# Altium PCB EEU_SSSHIpin.PcbDoc (part 2 of 2)
Units mil, origin at the board's own origin, x right, y up, seen from the top; angles counter-clockwise.
Board outline 6000 x 4000 mil, 2 copper layers (Top Layer, Bottom Layer); 240 components, 16 nets, 1184 pads, 256 vias.
Unrouted connection lines stored in the file: 240.
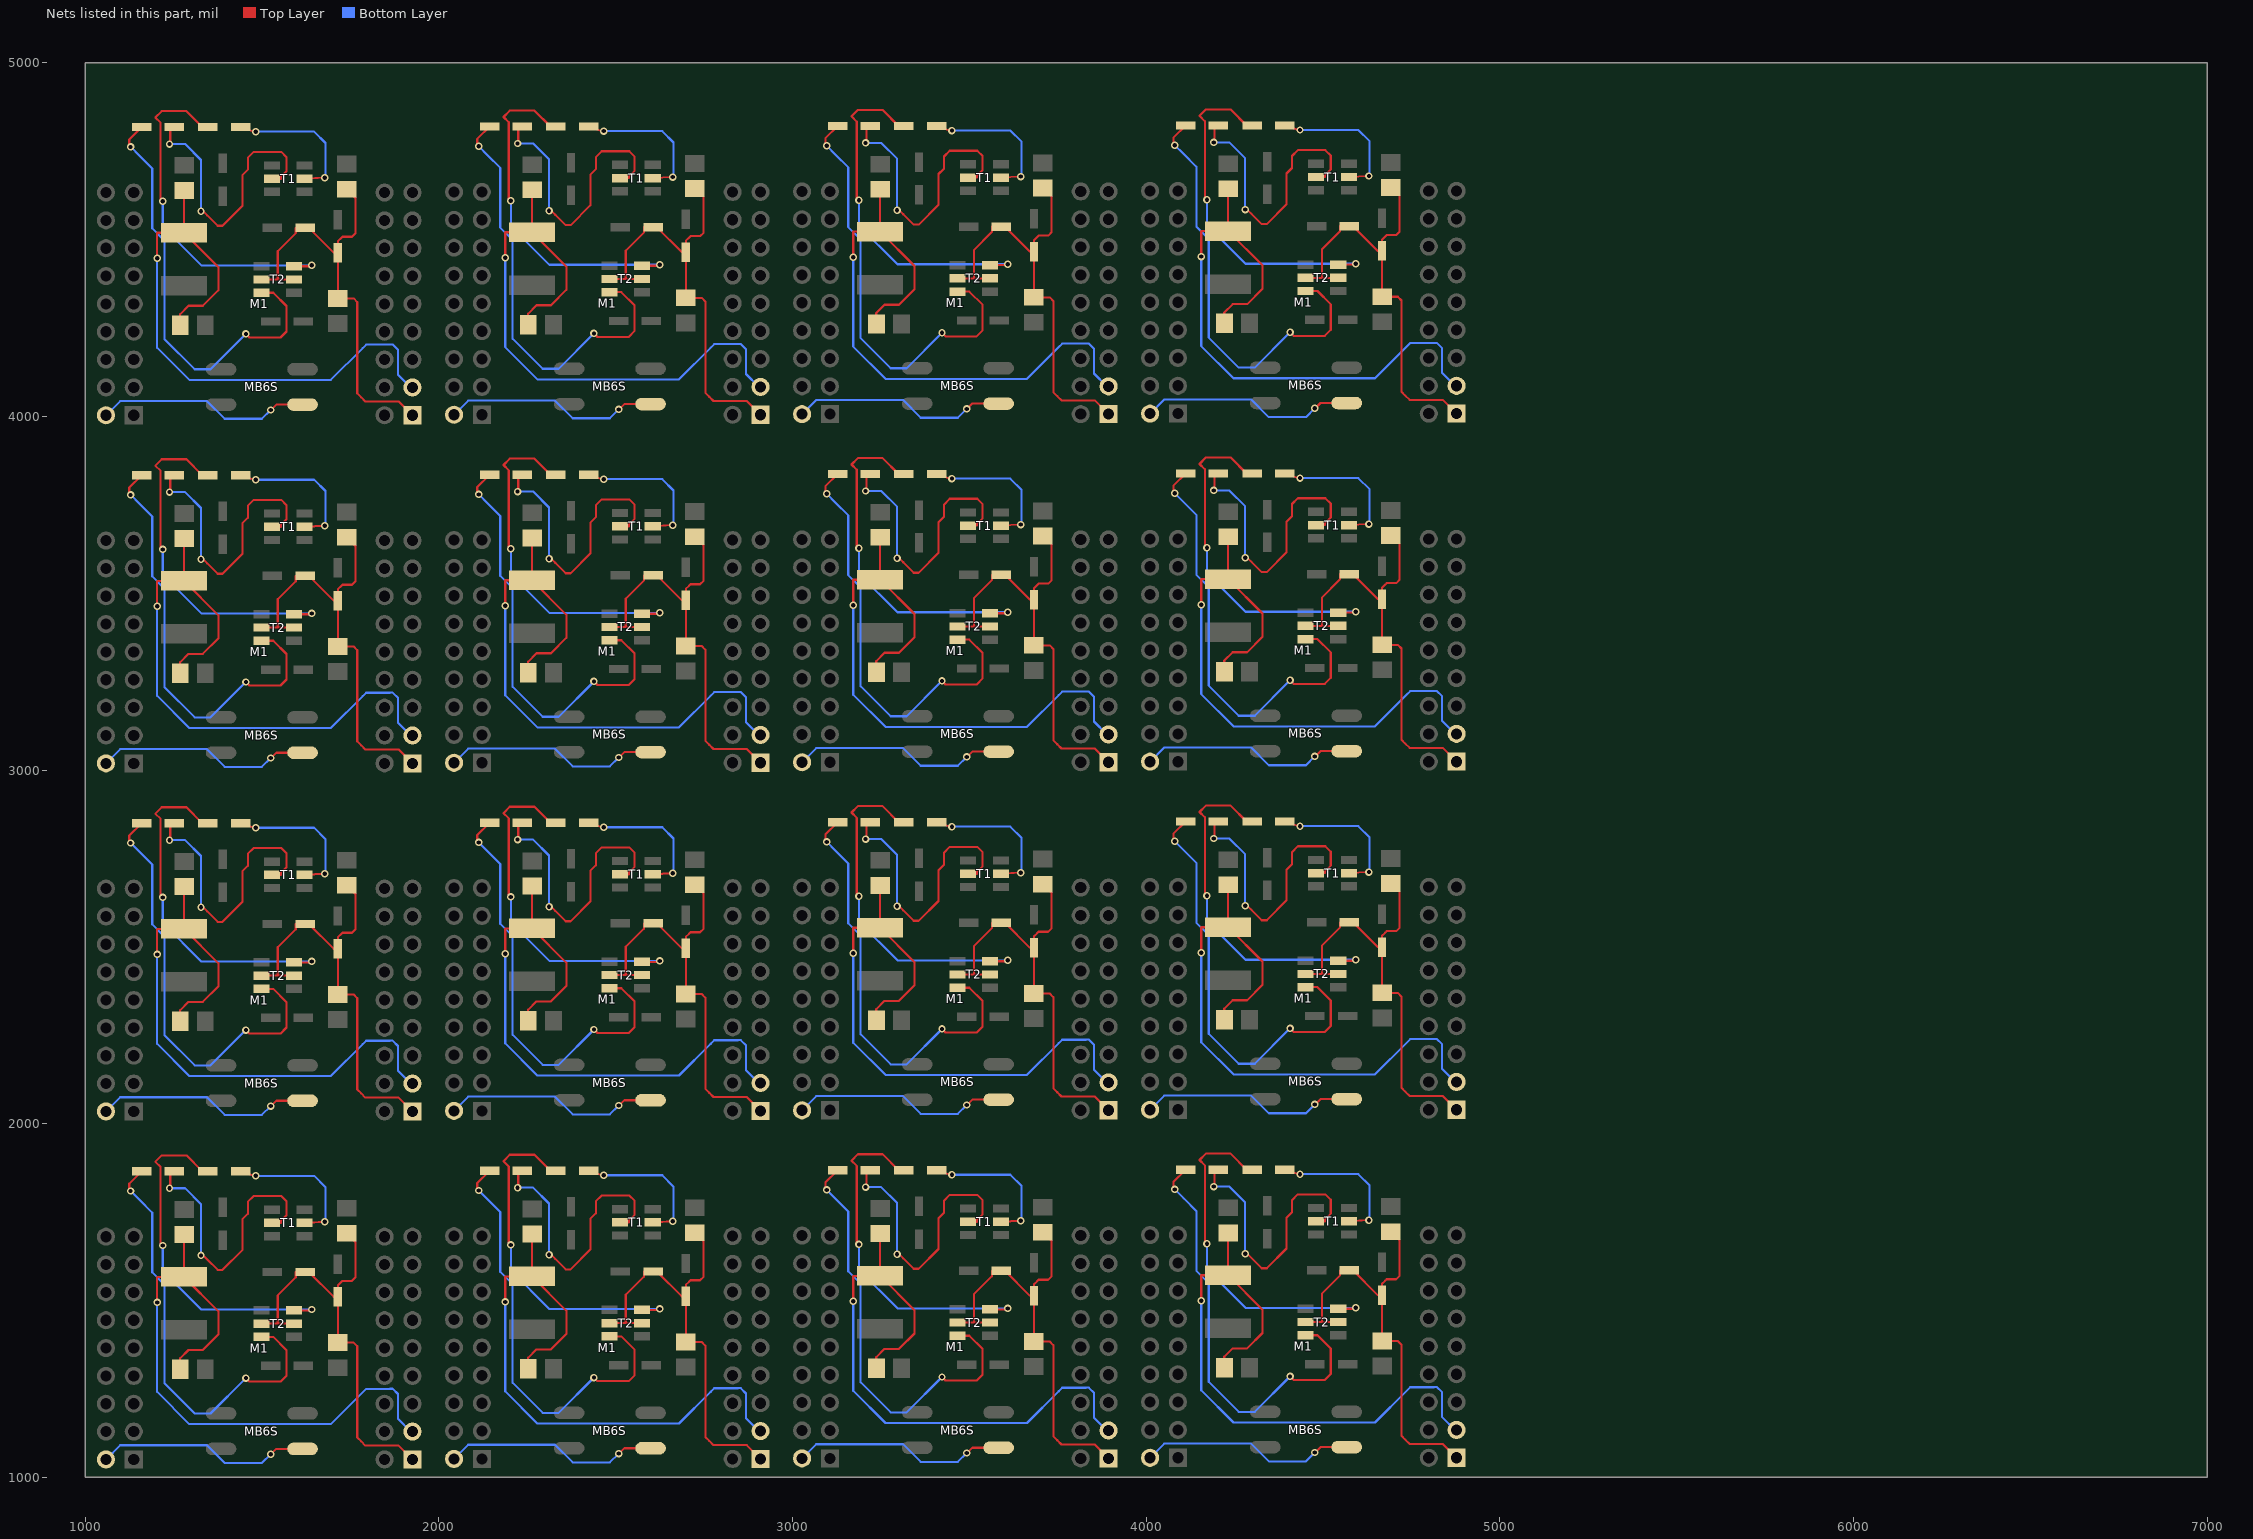
[diagram p2: the nets of this part, all layers, seen from the top]

## Via types
v1: diameter 21, hole 12, Top Layer to Bottom Layer, 256 vias

## Nets (pads, with @x,y where several pads share a name; then routed paths per layer and width w, separated by ;. In a path a pad name is that pad's centre, name@x,y a point inside that pad or via, vN(x,y) a via of type N, cw(c..) or ccw(c..) an arc to the next point about the centre after c; other vN are vias at no path point) (continued)
NetD5_1: D5.1 T2.4 | length 19934.5
  Top Layer w6: v1@1124,1809.8 1124,1830.8 D5.1@1159,1865.8 ; v1@1124,2794.05 1124,2815.05 D5.1@1159,2850.05 ; v1@1124,3778.3 1124,3799.3 D5.1@1159,3834.3 ; v1@1124,4762.55 1124,4783.55 D5.1@1159,4818.55 ; v1(1454,1280.8) 1464,1270.8 1552,1270.8 1569,1287.8 1569,1359.8 1531.41,1397.4 T2.4@1497.74,1397.4 ; v1(1454,2265.05) 1464,2255.05 1552,2255.05 1569,2272.05 1569,2344.05 1531.41,2381.65 T2.4@1497.74,2381.65 ; v1(1454,3249.3) 1464,3239.3 1552,3239.3 1569,3256.3 1569,3328.3 1531.41,3365.9 T2.4@1497.74,3365.9 ; v1(1454,4233.55) 1464,4223.55 1552,4223.55 1569,4240.55 1569,4312.55 1531.41,4350.15 T2.4@1497.74,4350.15 ; v1@2108.26,1811.35 2108.26,1832.35 D5.1@2143.26,1867.35 ; v1@2108.26,2795.6 2108.26,2816.6 D5.1@2143.26,2851.6 ; v1@2108.26,3779.85 2108.26,3800.85 D5.1@2143.26,3835.85 ; v1@2108.26,4764.1 2108.26,4785.1 D5.1@2143.26,4820.1 ; v1(2438.26,1282.35) 2448.26,1272.35 2536.26,1272.35 2553.26,1289.35 2553.26,1361.35 2515.66,1398.94 T2.4@2482,1398.94 ; v1(2438.26,2266.6) 2448.26,2256.6 2536.26,2256.6 2553.26,2273.6 2553.26,2345.6 2515.66,2383.2 T2.4@2482,2383.2 ; v1(2438.26,3250.85) 2448.26,3240.85 2536.26,3240.85 2553.26,3257.85 2553.26,3329.85 2515.66,3367.45 T2.4@2482,3367.45 ; v1(2438.26,4235.1) 2448.26,4225.1 2536.26,4225.1 2553.26,4242.1 2553.26,4314.1 2515.66,4351.7 T2.4@2482,4351.7 ; v1@3092.51,1812.89 3092.51,1833.89 D5.1@3127.51,1868.89 ; v1@3092.51,2797.15 3092.51,2818.15 D5.1@3127.51,2853.15 ; v1@3092.51,3781.4 3092.51,3802.4 D5.1@3127.51,3837.4 ; v1@3092.51,4765.65 3092.51,4786.65 D5.1@3127.51,4821.65 ; v1(3422.51,1283.89) 3432.51,1273.89 3520.51,1273.89 3537.51,1290.89 3537.51,1362.89 3499.91,1400.49 T2.4@3466.25,1400.49 ; v1(3422.51,2268.15) 3432.51,2258.15 3520.51,2258.15 3537.51,2275.15 3537.51,2347.15 3499.91,2384.74 T2.4@3466.25,2384.74 ; v1(3422.51,3252.4) 3432.51,3242.4 3520.51,3242.4 3537.51,3259.4 3537.51,3331.4 3499.91,3369 T2.4@3466.25,3369 ; v1(3422.51,4236.65) 3432.51,4226.65 3520.51,4226.65 3537.51,4243.65 3537.51,4315.65 3499.91,4353.25 T2.4@3466.25,4353.25 ; v1@4076.76,1814.44 4076.76,1835.44 D5.1@4111.76,1870.44 ; v1@4076.76,2798.69 4076.76,2819.69 D5.1@4111.76,2854.69 ; v1@4076.76,3782.95 4076.76,3803.95 D5.1@4111.76,3838.95 ; v1@4076.76,4767.2 4076.76,4788.2 D5.1@4111.76,4823.2 ; v1(4406.76,1285.44) 4416.76,1275.44 4504.76,1275.44 4521.76,1292.44 4521.76,1364.44 4484.16,1402.04 T2.4@4450.5,1402.04 ; v1(4406.76,2269.69) 4416.76,2259.69 4504.76,2259.69 4521.76,2276.69 4521.76,2348.69 4484.16,2386.29 T2.4@4450.5,2386.29 ; v1(4406.76,3253.95) 4416.76,3243.95 4504.76,3243.95 4521.76,3260.95 4521.76,3332.95 4484.16,3370.54 T2.4@4450.5,3370.54 ; v1(4406.76,4238.2) 4416.76,4228.2 4504.76,4228.2 4521.76,4245.2 4521.76,4317.2 4484.16,4354.8 T2.4@4450.5,4354.8
  Bottom Layer w6: v1(1128,1809.8) 1153,1784.8 1189,1748.8 1189,1610.8 1189,1579.8 1224,1544.8 1224,1360.8 1224,1265.8 1309,1180.8 1354,1180.8 v1(1454,1280.8) ; v1(1128,2794.05) 1153,2769.05 1189,2733.05 1189,2595.05 1189,2564.05 1224,2529.05 1224,2345.05 1224,2250.05 1309,2165.05 1354,2165.05 v1(1454,2265.05) ; v1(1128,3778.3) 1153,3753.3 1189,3717.3 1189,3579.3 1189,3548.3 1224,3513.3 1224,3329.3 1224,3234.3 1309,3149.3 1354,3149.3 v1(1454,3249.3) ; v1(1128,4762.55) 1153,4737.55 1189,4701.55 1189,4563.55 1189,4532.55 1224,4497.55 1224,4313.55 1224,4218.55 1309,4133.55 1354,4133.55 v1(1454,4233.55) ; v1(2112.26,1811.35) 2137.26,1786.35 2173.26,1750.35 2173.26,1612.35 2173.26,1581.35 2208.26,1546.35 2208.26,1362.35 2208.26,1267.35 2293.26,1182.35 2338.26,1182.35 v1(2438.26,1282.35) ; v1(2112.26,2795.6) 2137.26,2770.6 2173.26,2734.6 2173.26,2596.6 2173.26,2565.6 2208.26,2530.6 2208.26,2346.6 2208.26,2251.6 2293.26,2166.6 2338.26,2166.6 v1(2438.26,2266.6) ; v1(2112.26,3779.85) 2137.26,3754.85 2173.26,3718.85 2173.26,3580.85 2173.26,3549.85 2208.26,3514.85 2208.26,3330.85 2208.26,3235.85 2293.26,3150.85 2338.26,3150.85 v1(2438.26,3250.85) ; v1(2112.26,4764.1) 2137.26,4739.1 2173.26,4703.1 2173.26,4565.1 2173.26,4534.1 2208.26,4499.1 2208.26,4315.1 2208.26,4220.1 2293.26,4135.1 2338.26,4135.1 v1(2438.26,4235.1) ; v1(3096.51,1812.89) 3121.51,1787.89 3157.51,1751.89 3157.51,1613.89 3157.51,1582.89 3192.51,1547.89 3192.51,1363.89 3192.51,1268.89 3277.51,1183.89 3322.51,1183.89 v1(3422.51,1283.89) ; v1(3096.51,2797.15) 3121.51,2772.15 3157.51,2736.15 3157.51,2598.15 3157.51,2567.15 3192.51,2532.15 3192.51,2348.15 3192.51,2253.15 3277.51,2168.15 3322.51,2168.15 v1(3422.51,2268.15) ; v1(3096.51,3781.4) 3121.51,3756.4 3157.51,3720.4 3157.51,3582.4 3157.51,3551.4 3192.51,3516.4 3192.51,3332.4 3192.51,3237.4 3277.51,3152.4 3322.51,3152.4 v1(3422.51,3252.4) ; v1(3096.51,4765.65) 3121.51,4740.65 3157.51,4704.65 3157.51,4566.65 3157.51,4535.65 3192.51,4500.65 3192.51,4316.65 3192.51,4221.65 3277.51,4136.65 3322.51,4136.65 v1(3422.51,4236.65) ; v1(4080.76,1814.44) 4105.76,1789.44 4141.76,1753.44 4141.76,1615.44 4141.76,1584.44 4176.76,1549.44 4176.76,1365.44 4176.76,1270.44 4261.76,1185.44 4306.76,1185.44 v1(4406.76,1285.44) ; v1(4080.76,2798.69) 4105.76,2773.69 4141.76,2737.69 4141.76,2599.69 4141.76,2568.69 4176.76,2533.69 4176.76,2349.69 4176.76,2254.69 4261.76,2169.69 4306.76,2169.69 v1(4406.76,2269.69) ; v1(4080.76,3782.95) 4105.76,3757.95 4141.76,3721.95 4141.76,3583.95 4141.76,3552.95 4176.76,3517.95 4176.76,3333.95 4176.76,3238.95 4261.76,3153.95 4306.76,3153.95 v1(4406.76,3253.95) ; v1(4080.76,4767.2) 4105.76,4742.2 4141.76,4706.2 4141.76,4568.2 4141.76,4537.2 4176.76,4502.2 4176.76,4318.2 4176.76,4223.2 4261.76,4138.2 4306.76,4138.2 v1(4406.76,4238.2)
NetD5_2: D5.2 T1.5 | length 13273.8
  Top Layer w6: v1(1238,1817.8) 1240,1819.8 1240,1865.8 D5.2@1251.52,1865.8 ; v1(1238,2802.05) 1240,2804.05 1240,2850.05 D5.2@1251.52,2850.05 ; v1(1238,3786.3) 1240,3788.3 1240,3834.3 D5.2@1251.52,3834.3 ; v1(1238,4770.55) 1240,4772.55 1240,4818.55 D5.2@1251.52,4818.55 ; v1@1328,1632.8 1344.5,1616.3 1374,1586.8 1388,1586.8 1444,1642.8 1444,1729.8 1459.5,1745.3 1459.5,1779.33 1475.97,1795.8 1554,1795.8 1569,1780.8 1569,1741.17 1553,1725.17 1553,1719.8 T1.5@1527.74,1719.8 ; v1@1328,2617.05 1344.5,2600.55 1374,2571.05 1388,2571.05 1444,2627.05 1444,2714.05 1459.5,2729.55 1459.5,2763.58 1475.97,2780.05 1554,2780.05 1569,2765.05 1569,2725.42 1553,2709.42 1553,2704.05 T1.5@1527.74,2704.05 ; v1@1328,3601.3 1344.5,3584.8 1374,3555.3 1388,3555.3 1444,3611.3 1444,3698.3 1459.5,3713.8 1459.5,3747.83 1475.97,3764.3 1554,3764.3 1569,3749.3 1569,3709.68 1553,3693.68 1553,3688.3 T1.5@1527.74,3688.3 ; v1@1328,4585.55 1344.5,4569.05 1374,4539.55 1388,4539.55 1444,4595.55 1444,4682.55 1459.5,4698.05 1459.5,4732.08 1475.97,4748.55 1554,4748.55 1569,4733.55 1569,4693.93 1553,4677.93 1553,4672.55 T1.5@1527.74,4672.55 ; v1(2222.26,1819.35) 2224.26,1821.35 2224.26,1867.35 D5.2@2235.78,1867.35 ; v1(2222.26,2803.6) 2224.26,2805.6 2224.26,2851.6 D5.2@2235.78,2851.6 ; v1(2222.26,3787.85) 2224.26,3789.85 2224.26,3835.85 D5.2@2235.78,3835.85 ; v1(2222.26,4772.1) 2224.26,4774.1 2224.26,4820.1 D5.2@2235.78,4820.1 ; v1@2312.26,1634.35 2328.76,1617.85 2358.26,1588.35 2372.26,1588.35 2428.26,1644.35 2428.26,1731.35 2443.76,1746.85 2443.76,1780.88 2460.23,1797.35 2538.26,1797.35 2553.26,1782.35 2553.26,1742.72 2537.26,1726.72 2537.26,1721.35 T1.5@2512,1721.35 ; v1@2312.26,2618.6 2328.76,2602.1 2358.26,2572.6 2372.26,2572.6 2428.26,2628.6 2428.26,2715.6 2443.76,2731.1 2443.76,2765.13 2460.23,2781.6 2538.26,2781.6 2553.26,2766.6 2553.26,2726.97 2537.26,2710.97 2537.26,2705.6 T1.5@2512,2705.6 ; v1@2312.26,3602.85 2328.76,3586.35 2358.26,3556.85 2372.26,3556.85 2428.26,3612.85 2428.26,3699.85 2443.76,3715.35 2443.76,3749.38 2460.23,3765.85 2538.26,3765.85 2553.26,3750.85 2553.26,3711.22 2537.26,3695.22 2537.26,3689.85 T1.5@2512,3689.85 ; v1@2312.26,4587.1 2328.76,4570.6 2358.26,4541.1 2372.26,4541.1 2428.26,4597.1 2428.26,4684.1 2443.76,4699.6 2443.76,4733.63 2460.23,4750.1 2538.26,4750.1 2553.26,4735.1 2553.26,4695.48 2537.26,4679.48 2537.26,4674.1 T1.5@2512,4674.1 ; v1(3206.51,1820.89) 3208.51,1822.89 3208.51,1868.89 D5.2@3220.03,1868.89 ; v1(3206.51,2805.15) 3208.51,2807.15 3208.51,2853.15 D5.2@3220.03,2853.15 ; v1(3206.51,3789.4) 3208.51,3791.4 3208.51,3837.4 D5.2@3220.03,3837.4 ; v1(3206.51,4773.65) 3208.51,4775.65 3208.51,4821.65 D5.2@3220.03,4821.65 ; v1@3296.51,1635.89 3313.01,1619.39 3342.51,1589.89 3356.51,1589.89 3412.51,1645.89 3412.51,1732.89 3428.01,1748.39 3428.01,1782.42 3444.48,1798.89 3522.51,1798.89 3537.51,1783.89 3537.51,1744.27 3521.51,1728.27 3521.51,1722.89 T1.5@3496.25,1722.89 ; v1@3296.51,2620.15 3313.01,2603.65 3342.51,2574.15 3356.51,2574.15 3412.51,2630.15 3412.51,2717.15 3428.01,2732.65 3428.01,2766.68 3444.48,2783.15 3522.51,2783.15 3537.51,2768.15 3537.51,2728.52 3521.51,2712.52 3521.51,2707.15 T1.5@3496.25,2707.15 ; v1@3296.51,3604.4 3313.01,3587.9 3342.51,3558.4 3356.51,3558.4 3412.51,3614.4 3412.51,3701.4 3428.01,3716.9 3428.01,3750.93 3444.48,3767.4 3522.51,3767.4 3537.51,3752.4 3537.51,3712.77 3521.51,3696.77 3521.51,3691.4 T1.5@3496.25,3691.4 ; v1@3296.51,4588.65 3313.01,4572.15 3342.51,4542.65 3356.51,4542.65 3412.51,4598.65 3412.51,4685.65 3428.01,4701.15 3428.01,4735.18 3444.48,4751.65 3522.51,4751.65 3537.51,4736.65 3537.51,4697.02 3521.51,4681.02 3521.51,4675.65 T1.5@3496.25,4675.65 ; v1(4190.76,1822.44) 4192.76,1824.44 4192.76,1870.44 D5.2@4204.28,1870.44 ; v1(4190.76,2806.69) 4192.76,2808.69 4192.76,2854.69 D5.2@4204.28,2854.69 ; v1(4190.76,3790.95) 4192.76,3792.95 4192.76,3838.95 D5.2@4204.28,3838.95 ; v1(4190.76,4775.2) 4192.76,4777.2 4192.76,4823.2 D5.2@4204.28,4823.2 ; v1@4280.76,1637.44 4297.26,1620.94 4326.76,1591.44 4340.76,1591.44 4396.76,1647.44 4396.76,1734.44 4412.26,1749.94 4412.26,1783.97 4428.73,1800.44 4506.76,1800.44 4521.76,1785.44 4521.76,1745.82 4505.76,1729.82 4505.76,1724.44 T1.5@4480.5,1724.44 ; v1@4280.76,2621.69 4297.26,2605.19 4326.76,2575.69 4340.76,2575.69 4396.76,2631.69 4396.76,2718.69 4412.26,2734.19 4412.26,2768.22 4428.73,2784.69 4506.76,2784.69 4521.76,2769.69 4521.76,2730.07 4505.76,2714.07 4505.76,2708.69 T1.5@4480.5,2708.69 ; v1@4280.76,3605.95 4297.26,3589.45 4326.76,3559.95 4340.76,3559.95 4396.76,3615.95 4396.76,3702.95 4412.26,3718.45 4412.26,3752.48 4428.73,3768.95 4506.76,3768.95 4521.76,3753.95 4521.76,3714.32 4505.76,3698.32 4505.76,3692.95 T1.5@4480.5,3692.95 ; v1@4280.76,4590.2 4297.26,4573.7 4326.76,4544.2 4340.76,4544.2 4396.76,4600.2 4396.76,4687.2 4412.26,4702.7 4412.26,4736.73 4428.73,4753.2 4506.76,4753.2 4521.76,4738.2 4521.76,4698.57 4505.76,4682.57 4505.76,4677.2 T1.5@4480.5,4677.2
  Bottom Layer w6: v1(1238,1817.8) 1282,1817.8 1327,1772.8 v1(1327,1627.8) ; v1(1238,2802.05) 1282,2802.05 1327,2757.05 v1(1327,2612.05) ; v1(1238,3786.3) 1282,3786.3 1327,3741.3 v1(1327,3596.3) ; v1(1238,4770.55) 1282,4770.55 1327,4725.55 v1(1327,4580.55) ; v1(2222.26,1819.35) 2266.26,1819.35 2311.26,1774.35 v1(2311.26,1629.35) ; v1(2222.26,2803.6) 2266.26,2803.6 2311.26,2758.6 v1(2311.26,2613.6) ; v1(2222.26,3787.85) 2266.26,3787.85 2311.26,3742.85 v1(2311.26,3597.85) ; v1(2222.26,4772.1) 2266.26,4772.1 2311.26,4727.1 v1(2311.26,4582.1) ; v1(3206.51,1820.89) 3250.51,1820.89 3295.51,1775.89 v1(3295.51,1630.89) ; v1(3206.51,2805.15) 3250.51,2805.15 3295.51,2760.15 v1(3295.51,2615.15) ; v1(3206.51,3789.4) 3250.51,3789.4 3295.51,3744.4 v1(3295.51,3599.4) ; v1(3206.51,4773.65) 3250.51,4773.65 3295.51,4728.65 v1(3295.51,4583.65) ; v1(4190.76,1822.44) 4234.76,1822.44 4279.76,1777.44 v1(4279.76,1632.44) ; v1(4190.76,2806.69) 4234.76,2806.69 4279.76,2761.69 v1(4279.76,2616.69) ; v1(4190.76,3790.95) 4234.76,3790.95 4279.76,3745.95 v1(4279.76,3600.95) ; v1(4190.76,4775.2) 4234.76,4775.2 4279.76,4730.2 v1(4279.76,4585.2)
NetD6_1: D6.1 T1.2 | length 6613.4
  Top Layer w6: D6.1@1439,1865.8 v1@1484,1850.8 ; D6.1@1439,2850.05 v1@1484,2835.05 ; D6.1@1439,3834.3 v1@1484,3819.3 ; D6.1@1439,4818.55 v1@1484,4803.55 ; T1.2@1620.26,1719.8 v1(1677,1722.8) ; T1.2@1620.26,2704.05 v1(1677,2707.05) ; T1.2@1620.26,3688.3 v1(1677,3691.3) ; T1.2@1620.26,4672.55 v1(1677,4675.55) ; D6.1@2423.26,1867.35 v1@2468.26,1852.35 ; D6.1@2423.26,2851.6 v1@2468.26,2836.6 ; D6.1@2423.26,3835.85 v1@2468.26,3820.85 ; D6.1@2423.26,4820.1 v1@2468.26,4805.1 ; T1.2@2604.52,1721.35 v1(2661.26,1724.35) ; T1.2@2604.52,2705.6 v1(2661.26,2708.6) ; T1.2@2604.52,3689.85 v1(2661.26,3692.85) ; T1.2@2604.52,4674.1 v1(2661.26,4677.1) ; D6.1@3407.51,1868.89 v1@3452.51,1853.89 ; D6.1@3407.51,2853.15 v1@3452.51,2838.15 ; D6.1@3407.51,3837.4 v1@3452.51,3822.4 ; D6.1@3407.51,4821.65 v1@3452.51,4806.65 ; T1.2@3588.77,1722.89 v1(3645.51,1725.89) ; T1.2@3588.77,2707.15 v1(3645.51,2710.15) ; T1.2@3588.77,3691.4 v1(3645.51,3694.4) ; T1.2@3588.77,4675.65 v1(3645.51,4678.65) ; D6.1@4391.76,1870.44 v1@4436.76,1855.44 ; D6.1@4391.76,2854.69 v1@4436.76,2839.69 ; D6.1@4391.76,3838.95 v1@4436.76,3823.95 ; D6.1@4391.76,4823.2 v1@4436.76,4808.2 ; T1.2@4573.02,1724.44 v1(4629.76,1727.44) ; T1.2@4573.02,2708.69 v1(4629.76,2711.69) ; T1.2@4573.02,3692.95 v1(4629.76,3695.95) ; T1.2@4573.02,4677.2 v1(4629.76,4680.2)
  Bottom Layer w6: v1(1482,1852.8) 1647,1852.8 1679,1820.8 1679,1724.8 v1(1677,1722.8) ; v1(1482,2837.05) 1647,2837.05 1679,2805.05 1679,2709.05 v1(1677,2707.05) ; v1(1482,3821.3) 1647,3821.3 1679,3789.3 1679,3693.3 v1(1677,3691.3) ; v1(1482,4805.55) 1647,4805.55 1679,4773.55 1679,4677.55 v1(1677,4675.55) ; v1(2466.26,1854.35) 2631.26,1854.35 2663.26,1822.35 2663.26,1726.35 v1(2661.26,1724.35) ; v1(2466.26,2838.6) 2631.26,2838.6 2663.26,2806.6 2663.26,2710.6 v1(2661.26,2708.6) ; v1(2466.26,3822.85) 2631.26,3822.85 2663.26,3790.85 2663.26,3694.85 v1(2661.26,3692.85) ; v1(2466.26,4807.1) 2631.26,4807.1 2663.26,4775.1 2663.26,4679.1 v1(2661.26,4677.1) ; v1(3450.51,1855.89) 3615.51,1855.89 3647.51,1823.89 3647.51,1727.89 v1(3645.51,1725.89) ; v1(3450.51,2840.15) 3615.51,2840.15 3647.51,2808.15 3647.51,2712.15 v1(3645.51,2710.15) ; v1(3450.51,3824.4) 3615.51,3824.4 3647.51,3792.4 3647.51,3696.4 v1(3645.51,3694.4) ; v1(3450.51,4808.65) 3615.51,4808.65 3647.51,4776.65 3647.51,4680.65 v1(3645.51,4678.65) ; v1(4434.76,1857.44) 4599.76,1857.44 4631.76,1825.44 4631.76,1729.44 v1(4629.76,1727.44) ; v1(4434.76,2841.69) 4599.76,2841.69 4631.76,2809.69 4631.76,2713.69 v1(4629.76,2711.69) ; v1(4434.76,3825.95) 4599.76,3825.95 4631.76,3793.95 4631.76,3697.95 v1(4629.76,3695.95) ; v1(4434.76,4810.2) 4599.76,4810.2 4631.76,4778.2 4631.76,4682.2 v1(4629.76,4680.2)
NetD6_2: D6.2 T2.1 | length 16147.8
  Top Layer w6: v1(1219,1655.8) 1212.96,1661.84 1212.96,1877.84 1198,1892.8 1216,1910.8 1286,1910.8 1331,1865.8 D6.2@1346.48,1865.8 ; v1(1219,2640.05) 1212.96,2646.09 1212.96,2862.09 1198,2877.05 1216,2895.05 1286,2895.05 1331,2850.05 D6.2@1346.48,2850.05 ; v1(1219,3624.3) 1212.96,3630.34 1212.96,3846.34 1198,3861.3 1216,3879.3 1286,3879.3 1331,3834.3 D6.2@1346.48,3834.3 ; v1(1219,4608.55) 1212.96,4614.59 1212.96,4830.59 1198,4845.55 1216,4863.55 1286,4863.55 1331,4818.55 D6.2@1346.48,4818.55 ; T2.1@1590.26,1472.2 1637.41,1472.2 v1(1640,1474.8) ; T2.1@1590.26,2456.45 1637.41,2456.45 v1(1640,2459.05) ; T2.1@1590.26,3440.7 1637.41,3440.7 v1(1640,3443.3) ; T2.1@1590.26,4424.96 1637.41,4424.96 v1(1640,4427.55) ; v1(2203.26,1657.35) 2197.22,1663.39 2197.22,1879.39 2182.26,1894.35 2200.26,1912.35 2270.26,1912.35 2315.26,1867.35 D6.2@2330.74,1867.35 ; v1(2203.26,2641.6) 2197.22,2647.64 2197.22,2863.64 2182.26,2878.6 2200.26,2896.6 2270.26,2896.6 2315.26,2851.6 D6.2@2330.74,2851.6 ; v1(2203.26,3625.85) 2197.22,3631.89 2197.22,3847.89 2182.26,3862.85 2200.26,3880.85 2270.26,3880.85 2315.26,3835.85 D6.2@2330.74,3835.85 ; v1(2203.26,4610.1) 2197.22,4616.14 2197.22,4832.14 2182.26,4847.1 2200.26,4865.1 2270.26,4865.1 2315.26,4820.1 D6.2@2330.74,4820.1 ; T2.1@2574.52,1473.75 2621.66,1473.75 v1(2624.26,1476.35) ; T2.1@2574.52,2458 2621.66,2458 v1(2624.26,2460.6) ; T2.1@2574.52,3442.25 2621.66,3442.25 v1(2624.26,3444.85) ; T2.1@2574.52,4426.5 2621.66,4426.5 v1(2624.26,4429.1) ; v1(3187.51,1658.89) 3181.47,1664.93 3181.47,1880.93 3166.51,1895.89 3184.51,1913.89 3254.51,1913.89 3299.51,1868.89 D6.2@3314.99,1868.89 ; v1(3187.51,2643.15) 3181.47,2649.19 3181.47,2865.19 3166.51,2880.15 3184.51,2898.15 3254.51,2898.15 3299.51,2853.15 D6.2@3314.99,2853.15 ; v1(3187.51,3627.4) 3181.47,3633.44 3181.47,3849.44 3166.51,3864.4 3184.51,3882.4 3254.51,3882.4 3299.51,3837.4 D6.2@3314.99,3837.4 ; v1(3187.51,4611.65) 3181.47,4617.69 3181.47,4833.69 3166.51,4848.65 3184.51,4866.65 3254.51,4866.65 3299.51,4821.65 D6.2@3314.99,4821.65 ; T2.1@3558.77,1475.3 3605.91,1475.3 v1(3608.51,1477.89) ; T2.1@3558.77,2459.55 3605.91,2459.55 v1(3608.51,2462.15) ; T2.1@3558.77,3443.8 3605.91,3443.8 v1(3608.51,3446.4) ; T2.1@3558.77,4428.05 3605.91,4428.05 v1(3608.51,4430.65) ; v1(4171.76,1660.44) 4165.72,1666.48 4165.72,1882.48 4150.76,1897.44 4168.76,1915.44 4238.76,1915.44 4283.76,1870.44 D6.2@4299.24,1870.44 ; v1(4171.76,2644.69) 4165.72,2650.73 4165.72,2866.73 4150.76,2881.69 4168.76,2899.69 4238.76,2899.69 4283.76,2854.69 D6.2@4299.24,2854.69 ; v1(4171.76,3628.95) 4165.72,3634.99 4165.72,3850.99 4150.76,3865.95 4168.76,3883.95 4238.76,3883.95 4283.76,3838.95 D6.2@4299.24,3838.95 ; v1(4171.76,4613.2) 4165.72,4619.24 4165.72,4835.24 4150.76,4850.2 4168.76,4868.2 4238.76,4868.2 4283.76,4823.2 D6.2@4299.24,4823.2 ; T2.1@4543.02,1476.84 4590.16,1476.84 v1(4592.76,1479.44) ; T2.1@4543.02,2461.1 4590.16,2461.1 v1(4592.76,2463.69) ; T2.1@4543.02,3445.35 4590.16,3445.35 v1(4592.76,3447.95) ; T2.1@4543.02,4429.6 4590.16,4429.6 v1(4592.76,4432.2)
  Bottom Layer w6: v1(1219,1655.8) 1219,1583.8 1328,1474.8 v1(1640,1474.8) ; v1(1219,2640.05) 1219,2568.05 1328,2459.05 v1(1640,2459.05) ; v1(1219,3624.3) 1219,3552.3 1328,3443.3 v1(1640,3443.3) ; v1(1219,4608.55) 1219,4536.55 1328,4427.55 v1(1640,4427.55) ; v1(2203.26,1657.35) 2203.26,1585.35 2312.26,1476.35 v1(2624.26,1476.35) ; v1(2203.26,2641.6) 2203.26,2569.6 2312.26,2460.6 v1(2624.26,2460.6) ; v1(2203.26,3625.85) 2203.26,3553.85 2312.26,3444.85 v1(2624.26,3444.85) ; v1(2203.26,4610.1) 2203.26,4538.1 2312.26,4429.1 v1(2624.26,4429.1) ; v1(3187.51,1658.89) 3187.51,1586.89 3296.51,1477.89 v1(3608.51,1477.89) ; v1(3187.51,2643.15) 3187.51,2571.15 3296.51,2462.15 v1(3608.51,2462.15) ; v1(3187.51,3627.4) 3187.51,3555.4 3296.51,3446.4 v1(3608.51,3446.4) ; v1(3187.51,4611.65) 3187.51,4539.65 3296.51,4430.65 v1(3608.51,4430.65) ; v1(4171.76,1660.44) 4171.76,1588.44 4280.76,1479.44 v1(4592.76,1479.44) ; v1(4171.76,2644.69) 4171.76,2572.69 4280.76,2463.69 v1(4592.76,2463.69) ; v1(4171.76,3628.95) 4171.76,3556.95 4280.76,3447.95 v1(4592.76,3447.95) ; v1(4171.76,4613.2) 4171.76,4541.2 4280.76,4432.2 v1(4592.76,4432.2)
PZ1: C1.1 C2.1 L1.1 M1.3 | length 29068.1
  Top Layer w6: v1@1203,1495.8 1203,1566.9 L1.1@1279,1566.9 ; v1@1203,2480.05 1203,2551.15 L1.1@1279,2551.15 ; v1@1203,3464.3 1203,3535.41 L1.1@1279,3535.41 ; v1@1203,4448.55 1203,4519.66 L1.1@1279,4519.66 ; C2.1@1268.57,1305.8 1268,1305.8 1268,1336.8 1291.57,1360.36 1332.46,1360.36 1376,1403.9 1376,1469.9 L1.1@1279,1566.9 ; C2.1@1268.57,2290.05 1268,2290.05 1268,2321.05 1291.57,2344.61 1332.46,2344.61 1376,2388.15 1376,2454.15 L1.1@1279,2551.15 ; C2.1@1268.57,3274.3 1268,3274.3 1268,3305.3 1291.57,3328.86 1332.46,3328.86 1376,3372.41 1376,3438.41 L1.1@1279,3535.41 ; C2.1@1268.57,4258.55 1268,4258.55 1268,4289.55 1291.57,4313.12 1332.46,4313.12 1376,4356.66 1376,4422.66 L1.1@1279,4519.66 ; C1.1@1279,1686.67 L1.1@1279,1566.9 ; C1.1@1279,2670.92 L1.1@1279,2551.15 ; C1.1@1279,3655.17 L1.1@1279,3535.41 ; C1.1@1279,4639.42 L1.1@1279,4519.66 ; v1@2187.26,1497.35 2187.26,1568.45 L1.1@2263.26,1568.45 ; v1@2187.26,2481.6 2187.26,2552.7 L1.1@2263.26,2552.7 ; v1@2187.26,3465.85 2187.26,3536.95 L1.1@2263.26,3536.95 ; v1@2187.26,4450.1 2187.26,4521.21 L1.1@2263.26,4521.21 ; C2.1@2252.82,1307.35 2252.26,1307.35 2252.26,1338.35 2275.82,1361.91 2316.71,1361.91 2360.26,1405.45 2360.26,1471.45 L1.1@2263.26,1568.45 ; C2.1@2252.82,2291.6 2252.26,2291.6 2252.26,2322.6 2275.82,2346.16 2316.71,2346.16 2360.26,2389.7 2360.26,2455.7 L1.1@2263.26,2552.7 ; C2.1@2252.82,3275.85 2252.26,3275.85 2252.26,3306.85 2275.82,3330.41 2316.71,3330.41 2360.26,3373.95 2360.26,3439.95 L1.1@2263.26,3536.95 ; C2.1@2252.82,4260.1 2252.26,4260.1 2252.26,4291.1 2275.82,4314.66 2316.71,4314.66 2360.26,4358.21 2360.26,4424.21 L1.1@2263.26,4521.21 ; C1.1@2263.26,1688.21 L1.1@2263.26,1568.45 ; C1.1@2263.26,2672.47 L1.1@2263.26,2552.7 ; C1.1@2263.26,3656.72 L1.1@2263.26,3536.95 ; C1.1@2263.26,4640.97 L1.1@2263.26,4521.21 ; v1@3171.51,1498.89 3171.51,1570 L1.1@3247.51,1570 ; v1@3171.51,2483.15 3171.51,2554.25 L1.1@3247.51,2554.25 ; v1@3171.51,3467.4 3171.51,3538.5 L1.1@3247.51,3538.5 ; v1@3171.51,4451.65 3171.51,4522.75 L1.1@3247.51,4522.75 ; C2.1@3237.08,1308.89 3236.51,1308.89 3236.51,1339.89 3260.07,1363.46 3300.97,1363.46 3344.51,1407 3344.51,1473 L1.1@3247.51,1570 ; C2.1@3237.08,2293.15 3236.51,2293.15 3236.51,2324.15 3260.07,2347.71 3300.97,2347.71 3344.51,2391.25 3344.51,2457.25 L1.1@3247.51,2554.25 ; C2.1@3237.08,3277.4 3236.51,3277.4 3236.51,3308.4 3260.07,3331.96 3300.97,3331.96 3344.51,3375.5 3344.51,3441.5 L1.1@3247.51,3538.5 ; C2.1@3237.08,4261.65 3236.51,4261.65 3236.51,4292.65 3260.07,4316.21 3300.97,4316.21 3344.51,4359.75 3344.51,4425.75 L1.1@3247.51,4522.75 ; C1.1@3247.51,1689.76 L1.1@3247.51,1570 ; C1.1@3247.51,2674.01 L1.1@3247.51,2554.25 ; C1.1@3247.51,3658.27 L1.1@3247.51,3538.5 ; C1.1@3247.51,4642.52 L1.1@3247.51,4522.75 ; v1@4155.76,1500.44 4155.76,1571.55 L1.1@4231.76,1571.55 ; v1@4155.76,2484.69 4155.76,2555.8 L1.1@4231.76,2555.8 ; v1@4155.76,3468.95 4155.76,3540.05 L1.1@4231.76,3540.05 ; v1@4155.76,4453.2 4155.76,4524.3 L1.1@4231.76,4524.3 ; C2.1@4221.33,1310.44 4220.76,1310.44 4220.76,1341.44 4244.32,1365 4285.22,1365 4328.76,1408.55 4328.76,1474.55 L1.1@4231.76,1571.55 ; C2.1@4221.33,2294.69 4220.76,2294.69 4220.76,2325.69 4244.32,2349.26 4285.22,2349.26 4328.76,2392.8 4328.76,2458.8 L1.1@4231.76,2555.8 ; C2.1@4221.33,3278.95 4220.76,3278.95 4220.76,3309.95 4244.32,3333.51 4285.22,3333.51 4328.76,3377.05 4328.76,3443.05 L1.1@4231.76,3540.05 ; C2.1@4221.33,4263.2 4220.76,4263.2 4220.76,4294.2 4244.32,4317.76 4285.22,4317.76 4328.76,4361.3 4328.76,4427.3 L1.1@4231.76,4524.3 ; C1.1@4231.76,1691.31 L1.1@4231.76,1571.55 ; C1.1@4231.76,2675.56 L1.1@4231.76,2555.8 ; C1.1@4231.76,3659.81 L1.1@4231.76,3540.05 ; C1.1@4231.76,4644.07 L1.1@4231.76,4524.3
  Bottom Layer w6: 1203,1440.8 1203,1406.8 ; v1(1203,1494.8) 1203,1406.8 ; 1203,2425.05 1203,2391.05 ; v1(1203,2479.05) 1203,2391.05 ; 1203,3409.3 1203,3375.3 ; v1(1203,3463.3) 1203,3375.3 ; 1203,4393.55 1203,4359.55 ; v1(1203,4447.55) 1203,4359.55 ; M1.3@1925,1129.54 1920.26,1129.54 1884,1165.8 1884,1235.8 1869,1250.8 1861.79,1250.8 1861.42,1250.43 1794,1250.43 1784.19,1240.61 1694.37,1150.8 1294,1150.8 1203,1241.8 1203,1406.8 ; M1.3@1925,2113.79 1920.26,2113.79 1884,2150.05 1884,2220.05 1869,2235.05 1861.79,2235.05 1861.42,2234.68 1794,2234.68 1784.19,2224.86 1694.37,2135.05 1294,2135.05 1203,2226.05 1203,2391.05 ; M1.3@1925,3098.04 1920.26,3098.04 1884,3134.3 1884,3204.3 1869,3219.3 1861.79,3219.3 1861.42,3218.93 1794,3218.93 1784.19,3209.12 1694.37,3119.3 1294,3119.3 1203,3210.3 1203,3375.3 ; M1.3@1925,4082.29 1920.26,4082.29 1884,4118.55 1884,4188.55 1869,4203.55 1861.79,4203.55 1861.42,4203.18 1794,4203.18 1784.19,4193.37 1694.37,4103.55 1294,4103.55 1203,4194.55 1203,4359.55 ; 2187.26,1442.35 2187.26,1408.35 ; v1(2187.26,1496.35) 2187.26,1408.35 ; 2187.26,2426.6 2187.26,2392.6 ; v1(2187.26,2480.6) 2187.26,2392.6 ; 2187.26,3410.85 2187.26,3376.85 ; v1(2187.26,3464.85) 2187.26,3376.85 ; 2187.26,4395.1 2187.26,4361.1 ; v1(2187.26,4449.1) 2187.26,4361.1 ; M1.3@2909.26,1131.09 2904.52,1131.09 2868.26,1167.35 2868.26,1237.35 2853.26,1252.35 2846.04,1252.35 2845.67,1251.98 2778.26,1251.98 2768.44,1242.16 2678.63,1152.35 2278.26,1152.35 2187.26,1243.35 2187.26,1408.35 ; M1.3@2909.26,2115.34 2904.52,2115.34 2868.26,2151.6 2868.26,2221.6 2853.26,2236.6 2846.04,2236.6 2845.67,2236.23 2778.26,2236.23 2768.44,2226.41 2678.63,2136.6 2278.26,2136.6 2187.26,2227.6 2187.26,2392.6 ; M1.3@2909.26,3099.59 2904.52,3099.59 2868.26,3135.85 2868.26,3205.85 2853.26,3220.85 2846.04,3220.85 2845.67,3220.48 2778.26,3220.48 2768.44,3210.66 2678.63,3120.85 2278.26,3120.85 2187.26,3211.85 2187.26,3376.85 ; M1.3@2909.26,4083.84 2904.52,4083.84 2868.26,4120.1 2868.26,4190.1 2853.26,4205.1 2846.04,4205.1 2845.67,4204.73 2778.26,4204.73 2768.44,4194.92 2678.63,4105.1 2278.26,4105.1 2187.26,4196.1 2187.26,4361.1 ; 3171.51,1443.89 3171.51,1409.89 ; v1(3171.51,1497.89) 3171.51,1409.89 ; 3171.51,2428.15 3171.51,2394.15 ; v1(3171.51,2482.15) 3171.51,2394.15 ; 3171.51,3412.4 3171.51,3378.4 ; v1(3171.51,3466.4) 3171.51,3378.4 ; 3171.51,4396.65 3171.51,4362.65 ; v1(3171.51,4450.65) 3171.51,4362.65 ; M1.3@3893.51,1132.63 3888.77,1132.63 3852.51,1168.89 3852.51,1238.89 3837.51,1253.89 3830.29,1253.89 3829.92,1253.52 3762.51,1253.52 3752.69,1243.71 3662.88,1153.89 3262.51,1153.89 3171.51,1244.89 3171.51,1409.89 ; M1.3@3893.51,2116.89 3888.77,2116.89 3852.51,2153.15 3852.51,2223.15 3837.51,2238.15 3830.29,2238.15 3829.92,2237.78 3762.51,2237.78 3752.69,2227.96 3662.88,2138.15 3262.51,2138.15 3171.51,2229.15 3171.51,2394.15 ; M1.3@3893.51,3101.14 3888.77,3101.14 3852.51,3137.4 3852.51,3207.4 3837.51,3222.4 3830.29,3222.4 3829.92,3222.03 3762.51,3222.03 3752.69,3212.21 3662.88,3122.4 3262.51,3122.4 3171.51,3213.4 3171.51,3378.4 ; M1.3@3893.51,4085.39 3888.77,4085.39 3852.51,4121.65 3852.51,4191.65 3837.51,4206.65 3830.29,4206.65 3829.92,4206.28 3762.51,4206.28 3752.69,4196.47 3662.88,4106.65 3262.51,4106.65 3171.51,4197.65 3171.51,4362.65 ; 4155.76,1445.44 4155.76,1411.44 ; v1(4155.76,1499.44) 4155.76,1411.44 ; 4155.76,2429.69 4155.76,2395.69 ; v1(4155.76,2483.69) 4155.76,2395.69 ; 4155.76,3413.95 4155.76,3379.95 ; v1(4155.76,3467.95) 4155.76,3379.95 ; 4155.76,4398.2 4155.76,4364.2 ; v1(4155.76,4452.2) 4155.76,4364.2 ; M1.3@4877.76,1134.18 4873.02,1134.18 4836.76,1170.44 4836.76,1240.44 4821.76,1255.44 4814.55,1255.44 4814.18,1255.07 4746.76,1255.07 4736.94,1245.26 4647.13,1155.44 4246.76,1155.44 4155.76,1246.44 4155.76,1411.44 ; M1.3@4877.76,2118.43 4873.02,2118.43 4836.76,2154.69 4836.76,2224.69 4821.76,2239.69 4814.55,2239.69 4814.18,2239.32 4746.76,2239.32 4736.94,2229.51 4647.13,2139.69 4246.76,2139.69 4155.76,2230.69 4155.76,2395.69 ; M1.3@4877.76,3102.69 4873.02,3102.69 4836.76,3138.95 4836.76,3208.95 4821.76,3223.95 4814.55,3223.95 4814.18,3223.58 4746.76,3223.58 4736.94,3213.76 4647.13,3123.95 4246.76,3123.95 4155.76,3214.95 4155.76,3379.95 ; M1.3@4877.76,4086.94 4873.02,4086.94 4836.76,4123.2 4836.76,4193.2 4821.76,4208.2 4814.55,4208.2 4814.18,4207.83 4746.76,4207.83 4736.94,4198.01 4647.13,4108.2 4246.76,4108.2 4155.76,4199.2 4155.76,4364.2
PZ2: D1.1 D2.2 M1.1 R1.2 R2.2 T2.2 T2.5 | length 20794.5
  Top Layer w6: T2.5@1497.74,1434.8 1544,1434.8 ; T2.5@1497.74,2419.05 1544,2419.05 ; T2.5@1497.74,3403.3 1544,3403.3 ; T2.5@1497.74,4387.55 1544,4387.55 ; T2.2@1590.26,1434.8 1544,1434.8 ; T2.2@1590.26,2419.05 1544,2419.05 ; T2.2@1590.26,3403.3 1544,3403.3 ; T2.2@1590.26,4387.55 1544,4387.55 ; R1.2@1739,1690.36 1764,1665.36 1764,1565.8 1754,1555.8 1727,1555.8 1723,1551.8 1714,1542.8 D1.1@1714,1510.8 ; R1.2@1739,2674.62 1764,2649.62 1764,2550.05 1754,2540.05 1727,2540.05 1723,2536.05 1714,2527.05 D1.1@1714,2495.05 ; R1.2@1739,3658.87 1764,3633.87 1764,3534.3 1754,3524.3 1727,3524.3 1723,3520.3 1714,3511.3 D1.1@1714,3479.3 ; R1.2@1739,4643.12 1764,4618.12 1764,4518.55 1754,4508.55 1727,4508.55 1723,4504.55 1714,4495.55 D1.1@1714,4463.55 ; 1829,1089.8 1792,1089.8 ; 1829,2074.05 1792,2074.05 ; 1829,3058.3 1792,3058.3 ; 1829,4042.55 1792,4042.55 ; M1.1@1925,1050.8 1886,1089.8 1792,1089.8 ; M1.1@1925,2035.05 1886,2074.05 1792,2074.05 ; M1.1@1925,3019.3 1886,3058.3 1792,3058.3 ; M1.1@1925,4003.55 1886,4042.55 1792,4042.55 ; T2.5@2482,1436.35 2528.26,1436.35 ; T2.5@2482,2420.6 2528.26,2420.6 ; T2.5@2482,3404.85 2528.26,3404.85 ; T2.5@2482,4389.1 2528.26,4389.1 ; T2.2@2574.52,1436.35 2528.26,1436.35 ; T2.2@2574.52,2420.6 2528.26,2420.6 ; T2.2@2574.52,3404.85 2528.26,3404.85 ; T2.2@2574.52,4389.1 2528.26,4389.1 ; R1.2@2723.26,1691.91 2748.26,1666.91 2748.26,1567.35 2738.26,1557.35 2711.26,1557.35 2707.26,1553.35 2698.26,1544.35 D1.1@2698.26,1512.35 ; R1.2@2723.26,2676.16 2748.26,2651.16 2748.26,2551.6 2738.26,2541.6 2711.26,2541.6 2707.26,2537.6 2698.26,2528.6 D1.1@2698.26,2496.6 ; R1.2@2723.26,3660.42 2748.26,3635.42 2748.26,3535.85 2738.26,3525.85 2711.26,3525.85 2707.26,3521.85 2698.26,3512.85 D1.1@2698.26,3480.85 ; R1.2@2723.26,4644.67 2748.26,4619.67 2748.26,4520.1 2738.26,4510.1 2711.26,4510.1 2707.26,4506.1 2698.26,4497.1 D1.1@2698.26,4465.1 ; 2813.26,1091.35 2776.26,1091.35 ; 2813.26,2075.6 2776.26,2075.6 ; 2813.26,3059.85 2776.26,3059.85 ; 2813.26,4044.1 2776.26,4044.1 ; M1.1@2909.26,1052.35 2870.26,1091.35 2776.26,1091.35 ; M1.1@2909.26,2036.6 2870.26,2075.6 2776.26,2075.6 ; M1.1@2909.26,3020.85 2870.26,3059.85 2776.26,3059.85 ; M1.1@2909.26,4005.1 2870.26,4044.1 2776.26,4044.1 ; T2.5@3466.25,1437.89 3512.51,1437.89 ; T2.5@3466.25,2422.15 3512.51,2422.15 ; T2.5@3466.25,3406.4 3512.51,3406.4 ; T2.5@3466.25,4390.65 3512.51,4390.65 ; T2.2@3558.77,1437.89 3512.51,1437.89 ; T2.2@3558.77,2422.15 3512.51,2422.15 ; T2.2@3558.77,3406.4 3512.51,3406.4 ; T2.2@3558.77,4390.65 3512.51,4390.65 ; R1.2@3707.51,1693.46 3732.51,1668.46 3732.51,1568.89 3722.51,1558.89 3695.51,1558.89 3691.51,1554.89 3682.51,1545.89 D1.1@3682.51,1513.89 ; R1.2@3707.51,2677.71 3732.51,2652.71 3732.51,2553.15 3722.51,2543.15 3695.51,2543.15 3691.51,2539.15 3682.51,2530.15 D1.1@3682.51,2498.15 ; R1.2@3707.51,3661.96 3732.51,3636.96 3732.51,3537.4 3722.51,3527.4 3695.51,3527.4 3691.51,3523.4 3682.51,3514.4 D1.1@3682.51,3482.4 ; R1.2@3707.51,4646.22 3732.51,4621.22 3732.51,4521.65 3722.51,4511.65 3695.51,4511.65 3691.51,4507.65 3682.51,4498.65 D1.1@3682.51,4466.65 ; 3797.51,1092.89 3760.51,1092.89 ; 3797.51,2077.15 3760.51,2077.15 ; 3797.51,3061.4 3760.51,3061.4 ; 3797.51,4045.65 3760.51,4045.65 ; M1.1@3893.51,1053.89 3854.51,1092.89 3760.51,1092.89 ; M1.1@3893.51,2038.15 3854.51,2077.15 3760.51,2077.15 ; M1.1@3893.51,3022.4 3854.51,3061.4 3760.51,3061.4 ; M1.1@3893.51,4006.65 3854.51,4045.65 3760.51,4045.65 ; T2.5@4450.5,1439.44 4496.76,1439.44 ; T2.5@4450.5,2423.69 4496.76,2423.69 ; T2.5@4450.5,3407.95 4496.76,3407.95 ; T2.5@4450.5,4392.2 4496.76,4392.2 ; T2.2@4543.02,1439.44 4496.76,1439.44 ; T2.2@4543.02,2423.69 4496.76,2423.69 ; T2.2@4543.02,3407.95 4496.76,3407.95 ; T2.2@4543.02,4392.2 4496.76,4392.2 ; R1.2@4691.76,1695.01 4716.76,1670.01 4716.76,1570.44 4706.76,1560.44 4679.76,1560.44 4675.76,1556.44 4666.76,1547.44 D1.1@4666.76,1515.44 ; R1.2@4691.76,2679.26 4716.76,2654.26 4716.76,2554.69 4706.76,2544.69 4679.76,2544.69 4675.76,2540.69 4666.76,2531.69 D1.1@4666.76,2499.69 ; R1.2@4691.76,3663.51 4716.76,3638.51 4716.76,3538.95 4706.76,3528.95 4679.76,3528.95 4675.76,3524.95 4666.76,3515.95 D1.1@4666.76,3483.95 ; R1.2@4691.76,4647.76 4716.76,4622.76 4716.76,4523.2 4706.76,4513.2 4679.76,4513.2 4675.76,4509.2 4666.76,4500.2 D1.1@4666.76,4468.2 ; 4781.76,1094.44 4744.76,1094.44 ; 4781.76,2078.69 4744.76,2078.69 ; 4781.76,3062.95 4744.76,3062.95 ; 4781.76,4047.2 4744.76,4047.2 ; M1.1@4877.76,1055.44 4838.76,1094.44 4744.76,1094.44 ; M1.1@4877.76,2039.69 4838.76,2078.69 4744.76,2078.69 ; M1.1@4877.76,3023.95 4838.76,3062.95 4744.76,3062.95 ; M1.1@4877.76,4008.2 4838.76,4047.2 4744.76,4047.2 ; 1544,1434.8 1544,1514.8 1595,1565.8 1595,1580.8 D2.2@1621.52,1580.8 1632,1580.8 1702,1510.8 D1.1@1714,1510.8 ; 1544,2419.05 1544,2499.05 1595,2550.05 1595,2565.05 D2.2@1621.52,2565.05 1632,2565.05 1702,2495.05 D1.1@1714,2495.05 ; 1544,3403.3 1544,3483.3 1595,3534.3 1595,3549.3 D2.2@1621.52,3549.3 1632,3549.3 1702,3479.3 D1.1@1714,3479.3 ; 1544,4387.55 1544,4467.55 1595,4518.55 1595,4533.55 D2.2@1621.52,4533.55 1632,4533.55 1702,4463.55 D1.1@1714,4463.55 ; D1.1@1714,1510.8 R2.2@1714,1381.23 1758.57,1381.23 1769,1370.8 1769,1112.8 1780,1101.8 1792,1089.8 ; D1.1@1714,2495.05 R2.2@1714,2365.48 1758.57,2365.48 1769,2355.05 1769,2097.05 1780,2086.05 1792,2074.05 ; D1.1@1714,3479.3 R2.2@1714,3349.74 1758.57,3349.74 1769,3339.3 1769,3081.3 1780,3070.3 1792,3058.3 ; D1.1@1714,4463.55 R2.2@1714,4333.99 1758.57,4333.99 1769,4323.55 1769,4065.55 1780,4054.55 1792,4042.55 ; 2528.26,1436.35 2528.26,1516.35 2579.26,1567.35 2579.26,1582.35 D2.2@2605.78,1582.35 2616.26,1582.35 2686.26,1512.35 D1.1@2698.26,1512.35 ; 2528.26,2420.6 2528.26,2500.6 2579.26,2551.6 2579.26,2566.6 D2.2@2605.78,2566.6 2616.26,2566.6 2686.26,2496.6 D1.1@2698.26,2496.6 ; 2528.26,3404.85 2528.26,3484.85 2579.26,3535.85 2579.26,3550.85 D2.2@2605.78,3550.85 2616.26,3550.85 2686.26,3480.85 D1.1@2698.26,3480.85 ; 2528.26,4389.1 2528.26,4469.1 2579.26,4520.1 2579.26,4535.1 D2.2@2605.78,4535.1 2616.26,4535.1 2686.26,4465.1 D1.1@2698.26,4465.1 ; D1.1@2698.26,1512.35 R2.2@2698.26,1382.78 2742.82,1382.78 2753.26,1372.35 2753.26,1114.35 2764.26,1103.35 2776.26,1091.35 ; D1.1@2698.26,2496.6 R2.2@2698.26,2367.03 2742.82,2367.03 2753.26,2356.6 2753.26,2098.6 2764.26,2087.6 2776.26,2075.6 ; D1.1@2698.26,3480.85 R2.2@2698.26,3351.28 2742.82,3351.28 2753.26,3340.85 2753.26,3082.85 2764.26,3071.85 2776.26,3059.85 ; D1.1@2698.26,4465.1 R2.2@2698.26,4335.54 2742.82,4335.54 2753.26,4325.1 2753.26,4067.1 2764.26,4056.1 2776.26,4044.1 ; 3512.51,1437.89 3512.51,1517.89 3563.51,1568.89 3563.51,1583.89 D2.2@3590.03,1583.89 3600.51,1583.89 3670.51,1513.89 D1.1@3682.51,1513.89 ; 3512.51,2422.15 3512.51,2502.15 3563.51,2553.15 3563.51,2568.15 D2.2@3590.03,2568.15 3600.51,2568.15 3670.51,2498.15 D1.1@3682.51,2498.15 ; 3512.51,3406.4 3512.51,3486.4 3563.51,3537.4 3563.51,3552.4 D2.2@3590.03,3552.4 3600.51,3552.4 3670.51,3482.4 D1.1@3682.51,3482.4 ; 3512.51,4390.65 3512.51,4470.65 3563.51,4521.65 3563.51,4536.65 D2.2@3590.03,4536.65 3600.51,4536.65 3670.51,4466.65 D1.1@3682.51,4466.65 ; D1.1@3682.51,1513.89 R2.2@3682.51,1384.33 3727.07,1384.33 3737.51,1373.89 3737.51,1115.89 3748.51,1104.89 3760.51,1092.89 ; D1.1@3682.51,2498.15 R2.2@3682.51,2368.58 3727.07,2368.58 3737.51,2358.15 3737.51,2100.15 3748.51,2089.15 3760.51,2077.15 ; D1.1@3682.51,3482.4 R2.2@3682.51,3352.83 3727.07,3352.83 3737.51,3342.4 3737.51,3084.4 3748.51,3073.4 3760.51,3061.4 ; D1.1@3682.51,4466.65 R2.2@3682.51,4337.08 3727.07,4337.08 3737.51,4326.65 3737.51,4068.65 3748.51,4057.65 3760.51,4045.65 ; 4496.76,1439.44 4496.76,1519.44 4547.76,1570.44 4547.76,1585.44 D2.2@4574.28,1585.44 4584.76,1585.44 4654.76,1515.44 D1.1@4666.76,1515.44 ; 4496.76,2423.69 4496.76,2503.69 4547.76,2554.69 4547.76,2569.69 D2.2@4574.28,2569.69 4584.76,2569.69 4654.76,2499.69 D1.1@4666.76,2499.69 ; 4496.76,3407.95 4496.76,3487.95 4547.76,3538.95 4547.76,3553.95 D2.2@4574.28,3553.95 4584.76,3553.95 4654.76,3483.95 D1.1@4666.76,3483.95 ; 4496.76,4392.2 4496.76,4472.2 4547.76,4523.2 4547.76,4538.2 D2.2@4574.28,4538.2 4584.76,4538.2 4654.76,4468.2 D1.1@4666.76,4468.2 ; D1.1@4666.76,1515.44 R2.2@4666.76,1385.88 4711.33,1385.88 4721.76,1375.44 4721.76,1117.44 4732.76,1106.44 4744.76,1094.44 ; D1.1@4666.76,2499.69 R2.2@4666.76,2370.13 4711.33,2370.13 4721.76,2359.69 4721.76,2101.69 4732.76,2090.69 4744.76,2078.69 ; D1.1@4666.76,3483.95 R2.2@4666.76,3354.38 4711.33,3354.38 4721.76,3343.95 4721.76,3085.95 4732.76,3074.95 4744.76,3062.95 ; D1.1@4666.76,4468.2 R2.2@4666.76,4338.63 4711.33,4338.63 4721.76,4328.2 4721.76,4070.2 4732.76,4059.2 4744.76,4047.2
VSTO: M1.2 MB6S.4 | length 10006.7
  Top Layer w6: M1.2@1058.26,1050.8 M1.2@1058.26,1065.05 ; M1.2@1058.26,2035.05 M1.2@1058.26,2049.3 ; M1.2@1058.26,3019.3 M1.2@1058.26,3033.55 ; M1.2@1058.26,4003.55 M1.2@1058.26,4017.81 ; v1(1524,1065.8) 1524,1064.8 1524.5,1065.3 1540,1080.8 MB6S.4@1614.16,1080.8 ; v1(1524,2050.05) 1524,2049.05 1524.5,2049.55 1540,2065.05 MB6S.4@1614.16,2065.05 ; v1(1524,3034.3) 1524,3033.3 1524.5,3033.8 1540,3049.3 MB6S.4@1614.16,3049.3 ; v1(1524,4018.55) 1524,4017.55 1524.5,4018.05 1540,4033.55 MB6S.4@1614.16,4033.55 ; M1.2@2042.51,1052.35 M1.2@2042.51,1066.6 ; M1.2@2042.51,2036.6 M1.2@2042.51,2050.85 ; M1.2@2042.51,3020.85 M1.2@2042.51,3035.1 ; M1.2@2042.51,4005.1 M1.2@2042.51,4019.35 ; v1(2508.26,1067.35) 2508.26,1066.35 2508.76,1066.85 2524.26,1082.35 MB6S.4@2598.41,1082.35 ; v1(2508.26,2051.6) 2508.26,2050.6 2508.76,2051.1 2524.26,2066.6 MB6S.4@2598.41,2066.6 ; v1(2508.26,3035.85) 2508.26,3034.85 2508.76,3035.35 2524.26,3050.85 MB6S.4@2598.41,3050.85 ; v1(2508.26,4020.1) 2508.26,4019.1 2508.76,4019.6 2524.26,4035.1 MB6S.4@2598.41,4035.1 ; M1.2@3026.76,1053.89 M1.2@3026.76,1068.15 ; M1.2@3026.76,2038.15 M1.2@3026.76,2052.4 ; M1.2@3026.76,3022.4 M1.2@3026.76,3036.65 ; M1.2@3026.76,4006.65 M1.2@3026.76,4020.9 ; v1(3492.51,1068.89) 3492.51,1067.89 3493.01,1068.39 3508.51,1083.89 MB6S.4@3582.67,1083.89 ; v1(3492.51,2053.15) 3492.51,2052.15 3493.01,2052.65 3508.51,2068.15 MB6S.4@3582.67,2068.15 ; v1(3492.51,3037.4) 3492.51,3036.4 3493.01,3036.9 3508.51,3052.4 MB6S.4@3582.67,3052.4 ; v1(3492.51,4021.65) 3492.51,4020.65 3493.01,4021.15 3508.51,4036.65 MB6S.4@3582.67,4036.65 ; M1.2@4011.01,1055.44 M1.2@4011.01,1069.69 ; M1.2@4011.01,2039.69 M1.2@4011.01,2053.95 ; M1.2@4011.01,3023.95 M1.2@4011.01,3038.2 ; M1.2@4011.01,4008.2 M1.2@4011.01,4022.45 ; v1(4476.76,1070.44) 4476.76,1069.44 4477.26,1069.94 4492.76,1085.44 MB6S.4@4566.92,1085.44 ; v1(4476.76,2054.69) 4476.76,2053.69 4477.26,2054.19 4492.76,2069.69 MB6S.4@4566.92,2069.69 ; v1(4476.76,3038.95) 4476.76,3037.95 4477.26,3038.45 4492.76,3053.95 MB6S.4@4566.92,3053.95 ; v1(4476.76,4023.2) 4476.76,4022.2 4477.26,4022.7 4492.76,4038.2 MB6S.4@4566.92,4038.2
  Bottom Layer w6: M1.2@1058.26,1050.8 1098.26,1090.8 1344,1090.8 1394,1040.8 1499,1040.8 v1(1524,1065.8) ; M1.2@1058.26,2035.05 1098.26,2075.05 1344,2075.05 1394,2025.05 1499,2025.05 v1(1524,2050.05) ; M1.2@1058.26,3019.3 1098.26,3059.3 1344,3059.3 1394,3009.3 1499,3009.3 v1(1524,3034.3) ; M1.2@1058.26,4003.55 1098.26,4043.55 1344,4043.55 1394,3993.55 1499,3993.55 v1(1524,4018.55) ; M1.2@2042.51,1052.35 2082.51,1092.35 2328.26,1092.35 2378.26,1042.35 2483.26,1042.35 v1(2508.26,1067.35) ; M1.2@2042.51,2036.6 2082.51,2076.6 2328.26,2076.6 2378.26,2026.6 2483.26,2026.6 v1(2508.26,2051.6) ; M1.2@2042.51,3020.85 2082.51,3060.85 2328.26,3060.85 2378.26,3010.85 2483.26,3010.85 v1(2508.26,3035.85) ; M1.2@2042.51,4005.1 2082.51,4045.1 2328.26,4045.1 2378.26,3995.1 2483.26,3995.1 v1(2508.26,4020.1) ; M1.2@3026.76,1053.89 3066.76,1093.89 3312.51,1093.89 3362.51,1043.89 3467.51,1043.89 v1(3492.51,1068.89) ; M1.2@3026.76,2038.15 3066.76,2078.15 3312.51,2078.15 3362.51,2028.15 3467.51,2028.15 v1(3492.51,2053.15) ; M1.2@3026.76,3022.4 3066.76,3062.4 3312.51,3062.4 3362.51,3012.4 3467.51,3012.4 v1(3492.51,3037.4) ; M1.2@3026.76,4006.65 3066.76,4046.65 3312.51,4046.65 3362.51,3996.65 3467.51,3996.65 v1(3492.51,4021.65) ; M1.2@4011.01,1055.44 4051.01,1095.44 4296.76,1095.44 4346.76,1045.44 4451.76,1045.44 v1(4476.76,1070.44) ; M1.2@4011.01,2039.69 4051.01,2079.69 4296.76,2079.69 4346.76,2029.69 4451.76,2029.69 v1(4476.76,2054.69) ; M1.2@4011.01,3023.95 4051.01,3063.95 4296.76,3063.95 4346.76,3013.95 4451.76,3013.95 v1(4476.76,3038.95) ; M1.2@4011.01,4008.2 4051.01,4048.2 4296.76,4048.2 4346.76,3998.2 4451.76,3998.2 v1(4476.76,4023.2)
pads on no net: M1.4 M1.5 M1.6 M1.7 M1.8 M1.9 M1.10 M1.11 M1.12 M1.13 M1.14 M1.15 M1.16 M1.17 M1.18 M1.19 M1.20 M1.21 M1.22 M1.23 M1.24 M1.25 M1.26 M1.27 M1.28 M1.29 M1.30 M1.31 M1.32 M1.33 M1.34 M1.35

## Keep-outs
Keep-Out Layer:
  lines w10: 1175.62,1984.53 1982.7,1985.8 1984.25,1001.55 ; 1175.62,2968.78 1982.7,2970.05 1984.25,1985.8 ; 1175.62,3953.03 1982.7,3954.3 1984.25,2970.05 ; 1175.62,4937.28 1982.7,4938.55 1984.25,3954.3 ; 1175.9,1984.25 998.73,1807.09 1000,1000 1984.25,1001.55 ; 1175.9,2968.5 998.73,2791.34 1000,1984.25 1984.25,1985.8 ; 1175.9,3952.75 998.73,3775.59 1000,2968.5 1984.25,2970.05 ; 1175.9,4937.01 998.73,4759.84 1000,3952.76 1984.25,3954.3 ; 2159.87,1986.08 2966.96,1987.35 2968.5,1003.1 ; 2159.87,2970.33 2966.96,2971.6 2968.5,1987.35 ; 2159.87,3954.58 2966.96,3955.85 2968.5,2971.6 ; 2159.87,4938.83 2966.96,4940.1 2968.5,3955.85 ; 2160.15,1985.8 1982.98,1808.63 1984.25,1001.55 ; 2160.15,2970.05 1982.98,2792.89 1984.25,1985.8 ; 2160.15,3954.3 1982.98,3777.14 1984.25,2970.05 ; 2160.15,4938.55 1982.98,4761.39 1984.25,3954.3 ; 3144.12,1987.62 3951.21,1988.89 3952.76,1004.64 ; 3144.12,2971.88 3951.21,2973.15 3952.76,1988.9 ; 3144.12,3956.13 3951.21,3957.4 3952.76,2973.15 ; 3144.12,4940.38 3951.21,4941.65 3952.76,3957.4 ; 3144.4,1987.35 2967.24,1810.18 2968.5,1003.1 ; 3144.4,2971.6 2967.24,2794.43 2968.5,1987.35 ; 3144.4,3955.85 2967.24,3778.69 2968.5,2971.6 ; 3144.4,4940.1 2967.24,4762.94 2968.5,3955.85 ; 4128.37,1989.17 4935.46,1990.44 4937.01,1006.19 3952.76,1004.64 ; 4128.37,2973.42 4935.46,2974.69 4937.01,1990.44 3952.76,1988.9 ; 4128.37,3957.68 4935.46,3958.95 4937.01,2974.7 3952.76,2973.15 ; 4128.37,4941.93 4935.46,4943.2 4937.01,3958.95 3952.76,3957.4 ; 4128.65,1988.89 3951.49,1811.73 3952.76,1004.64 ; 4128.65,2973.15 3951.49,2795.98 3952.76,1988.9 ; 4128.65,3957.4 3951.49,3780.23 3952.76,2973.15 ; 4128.65,4941.65 3951.49,4764.49 3952.76,3957.4 ; 1984.25,1001.55 2968.5,1003.1 ; 1984.25,1985.8 2968.5,1987.35 ; 1984.25,2970.05 2968.5,2971.6 ; 1984.25,3954.3 2968.5,3955.85 ; 2968.5,1003.1 3952.76,1004.64 ; 2968.5,1987.35 3952.76,1988.9 ; 2968.5,2971.6 3952.76,2973.15 ; 2968.5,3955.85 3952.76,3957.4

## Silkscreen, mask and mechanical layers (free items; w line width, h text height)
Top Overlay:
  text "EEU" at 4761.76,4868.2 h80
  text "EEU" at 3777.51,4866.65 h80
  text "EEU" at 2793.26,4865.1 h80
  text "EEU" at 1809,4863.55 h80
  text "Self-Power Serial SSHI" at 4451.76,4823.2 h50
  text "Self-Power Serial SSHI" at 3467.51,4821.65 h50
  text "Self-Power Serial SSHI" at 2483.26,4820.1 h50
  text "Self-Power Serial SSHI" at 1499,4818.55 h50
  text "EEU" at 4761.76,3883.95 h80
  text "EEU" at 3777.51,3882.4 h80
  text "EEU" at 2793.26,3880.85 h80
  text "EEU" at 1809,3879.3 h80
  text "Self-Power Serial SSHI" at 4451.76,3838.95 h50
  text "Self-Power Serial SSHI" at 3467.51,3837.4 h50
  text "Self-Power Serial SSHI" at 2483.26,3835.85 h50
  text "Self-Power Serial SSHI" at 1499,3834.3 h50
  text "EEU" at 4761.76,2899.69 h80
  text "EEU" at 3777.51,2898.15 h80
  text "EEU" at 2793.26,2896.6 h80
  text "EEU" at 1809,2895.05 h80
  text "Self-Power Serial SSHI" at 4451.76,2854.69 h50
  text "Self-Power Serial SSHI" at 3467.51,2853.15 h50
  text "Self-Power Serial SSHI" at 2483.26,2851.6 h50
  text "Self-Power Serial SSHI" at 1499,2850.05 h50
  text "EEU" at 4761.76,1915.44 h80
  text "EEU" at 3777.51,1913.89 h80
  text "EEU" at 2793.26,1912.35 h80
  text "EEU" at 1809,1910.8 h80
  text "Self-Power Serial SSHI" at 4451.76,1870.44 h50
  text "Self-Power Serial SSHI" at 3467.51,1868.89 h50
  text "Self-Power Serial SSHI" at 2483.26,1867.35 h50
  text "Self-Power Serial SSHI" at 1499,1865.8 h50
Bottom Overlay:
  text "EEU of ViPSN 2.0" at 4746.76,4538.2 h80
  text "EEU of ViPSN 2.0" at 3762.51,4536.65 h80
  text "EEU of ViPSN 2.0" at 2778.26,4535.1 h80
  text "EEU of ViPSN 2.0" at 1794,4533.55 h80
  text "Degined by METAL" at 4676.76,4299.5 h60
  text "Degined by METAL" at 3692.51,4297.95 h60
  text "Degined by METAL" at 2708.26,4296.4 h60
  text "Degined by METAL" at 1724,4294.85 h60
  text "ShanghaiTech University" at 4736.76,4209.5 h60
  text "ShanghaiTech University" at 3752.51,4207.95 h60
  text "ShanghaiTech University" at 2768.26,4206.4 h60
  text "ShanghaiTech University" at 1784,4204.85 h60
  text "NOV. 2020" at 4561.76,4124.5 h60
  text "NOV. 2020" at 3577.51,4122.95 h60
  text "NOV. 2020" at 2593.26,4121.4 h60
  text "NOV. 2020" at 1609,4119.85 h60
  text "EEU of ViPSN 2.0" at 4746.76,3553.95 h80
  text "EEU of ViPSN 2.0" at 3762.51,3552.4 h80
  text "EEU of ViPSN 2.0" at 2778.26,3550.85 h80
  text "EEU of ViPSN 2.0" at 1794,3549.3 h80
  text "Degined by METAL" at 4676.76,3315.25 h60
  text "Degined by METAL" at 3692.51,3313.7 h60
  text "Degined by METAL" at 2708.26,3312.15 h60
  text "Degined by METAL" at 1724,3310.6 h60
  text "ShanghaiTech University" at 4736.76,3225.25 h60
  text "ShanghaiTech University" at 3752.51,3223.7 h60
  text "ShanghaiTech University" at 2768.26,3222.15 h60
  text "ShanghaiTech University" at 1784,3220.6 h60
  text "NOV. 2020" at 4561.76,3140.25 h60
  text "NOV. 2020" at 3577.51,3138.7 h60
  text "NOV. 2020" at 2593.26,3137.15 h60
  text "NOV. 2020" at 1609,3135.6 h60
  text "EEU of ViPSN 2.0" at 4746.76,2569.69 h80
  text "EEU of ViPSN 2.0" at 3762.51,2568.15 h80
  text "EEU of ViPSN 2.0" at 2778.26,2566.6 h80
  text "EEU of ViPSN 2.0" at 1794,2565.05 h80
  text "Degined by METAL" at 4676.76,2330.99 h60
  text "Degined by METAL" at 3692.51,2329.45 h60
  text "Degined by METAL" at 2708.26,2327.9 h60
  text "Degined by METAL" at 1724,2326.35 h60
  text "ShanghaiTech University" at 4736.76,2240.99 h60
  text "ShanghaiTech University" at 3752.51,2239.45 h60
  text "ShanghaiTech University" at 2768.26,2237.9 h60
  text "ShanghaiTech University" at 1784,2236.35 h60
  text "NOV. 2020" at 4561.76,2155.99 h60
  text "NOV. 2020" at 3577.51,2154.45 h60
  text "NOV. 2020" at 2593.26,2152.9 h60
  text "NOV. 2020" at 1609,2151.35 h60
  text "EEU of ViPSN 2.0" at 4746.76,1585.44 h80
  text "EEU of ViPSN 2.0" at 3762.51,1583.89 h80
  text "EEU of ViPSN 2.0" at 2778.26,1582.35 h80
  text "EEU of ViPSN 2.0" at 1794,1580.8 h80
  text "Degined by METAL" at 4676.76,1346.74 h60
  text "Degined by METAL" at 3692.51,1345.19 h60
  text "Degined by METAL" at 2708.26,1343.65 h60
  text "Degined by METAL" at 1724,1342.1 h60
  text "ShanghaiTech University" at 4736.76,1256.74 h60
  text "ShanghaiTech University" at 3752.51,1255.19 h60
  text "ShanghaiTech University" at 2768.26,1253.65 h60
  text "ShanghaiTech University" at 1784,1252.1 h60
  text "NOV. 2020" at 4561.76,1171.74 h60
  text "NOV. 2020" at 3577.51,1170.19 h60
  text "NOV. 2020" at 2593.26,1168.65 h60
  text "NOV. 2020" at 1609,1167.1 h60

## Text inside footprints (layer, text, board x,y; h text height)
MB6S: Top Overlay "~" at 4217.76,3974.2 h30; Top Overlay "~" at 4214.76,4076.2 h30; Top Overlay "+" at 4632.76,4005.2 h30
MB6S: Top Overlay "~" at 4217.76,2989.95 h30; Top Overlay "~" at 4214.76,3091.95 h30; Top Overlay "+" at 4632.76,3020.95 h30
MB6S: Top Overlay "~" at 4217.76,2005.69 h30; Top Overlay "~" at 4214.76,2107.69 h30; Top Overlay "+" at 4632.76,2036.69 h30
MB6S: Top Overlay "~" at 4217.76,1021.44 h30; Top Overlay "~" at 4214.76,1123.44 h30; Top Overlay "+" at 4632.76,1052.44 h30
MB6S: Top Overlay "~" at 3233.51,3972.65 h30; Top Overlay "~" at 3230.51,4074.65 h30; Top Overlay "+" at 3648.51,4003.65 h30
MB6S: Top Overlay "~" at 3233.51,2988.4 h30; Top Overlay "~" at 3230.51,3090.4 h30; Top Overlay "+" at 3648.51,3019.4 h30
MB6S: Top Overlay "~" at 3233.51,2004.15 h30; Top Overlay "~" at 3230.51,2106.15 h30; Top Overlay "+" at 3648.51,2035.15 h30
MB6S: Top Overlay "~" at 3233.51,1019.89 h30; Top Overlay "~" at 3230.51,1121.89 h30; Top Overlay "+" at 3648.51,1050.89 h30
MB6S: Top Overlay "~" at 2249.26,3971.1 h30; Top Overlay "~" at 2246.26,4073.1 h30; Top Overlay "+" at 2664.26,4002.1 h30
MB6S: Top Overlay "~" at 2249.26,2986.85 h30; Top Overlay "~" at 2246.26,3088.85 h30; Top Overlay "+" at 2664.26,3017.85 h30
MB6S: Top Overlay "~" at 2249.26,2002.6 h30; Top Overlay "~" at 2246.26,2104.6 h30; Top Overlay "+" at 2664.26,2033.6 h30
MB6S: Top Overlay "~" at 2249.26,1018.35 h30; Top Overlay "~" at 2246.26,1120.35 h30; Top Overlay "+" at 2664.26,1049.35 h30
MB6S: Top Overlay "~" at 1265,3969.55 h30; Top Overlay "~" at 1262,4071.55 h30; Top Overlay "+" at 1680,4000.55 h30
MB6S: Top Overlay "~" at 1265,2985.3 h30; Top Overlay "~" at 1262,3087.3 h30; Top Overlay "+" at 1680,3016.3 h30
MB6S: Top Overlay "~" at 1265,2001.05 h30; Top Overlay "~" at 1262,2103.05 h30; Top Overlay "+" at 1680,2032.05 h30
MB6S: Top Overlay "~" at 1265,1016.8 h30; Top Overlay "~" at 1262,1118.8 h30; Top Overlay "+" at 1680,1047.8 h30